# Altium PCB MAX51.PcbDoc (part 3 of 3)
Units mil, origin at the board's own origin, x right, y up, seen from the top; angles counter-clockwise.
Board outline 4625 x 3470 mil, 2 copper layers (Top Layer, Bottom Layer); 152 components, 205 nets, 817 pads, 224 vias.
Unrouted connection lines stored in the file: 41.
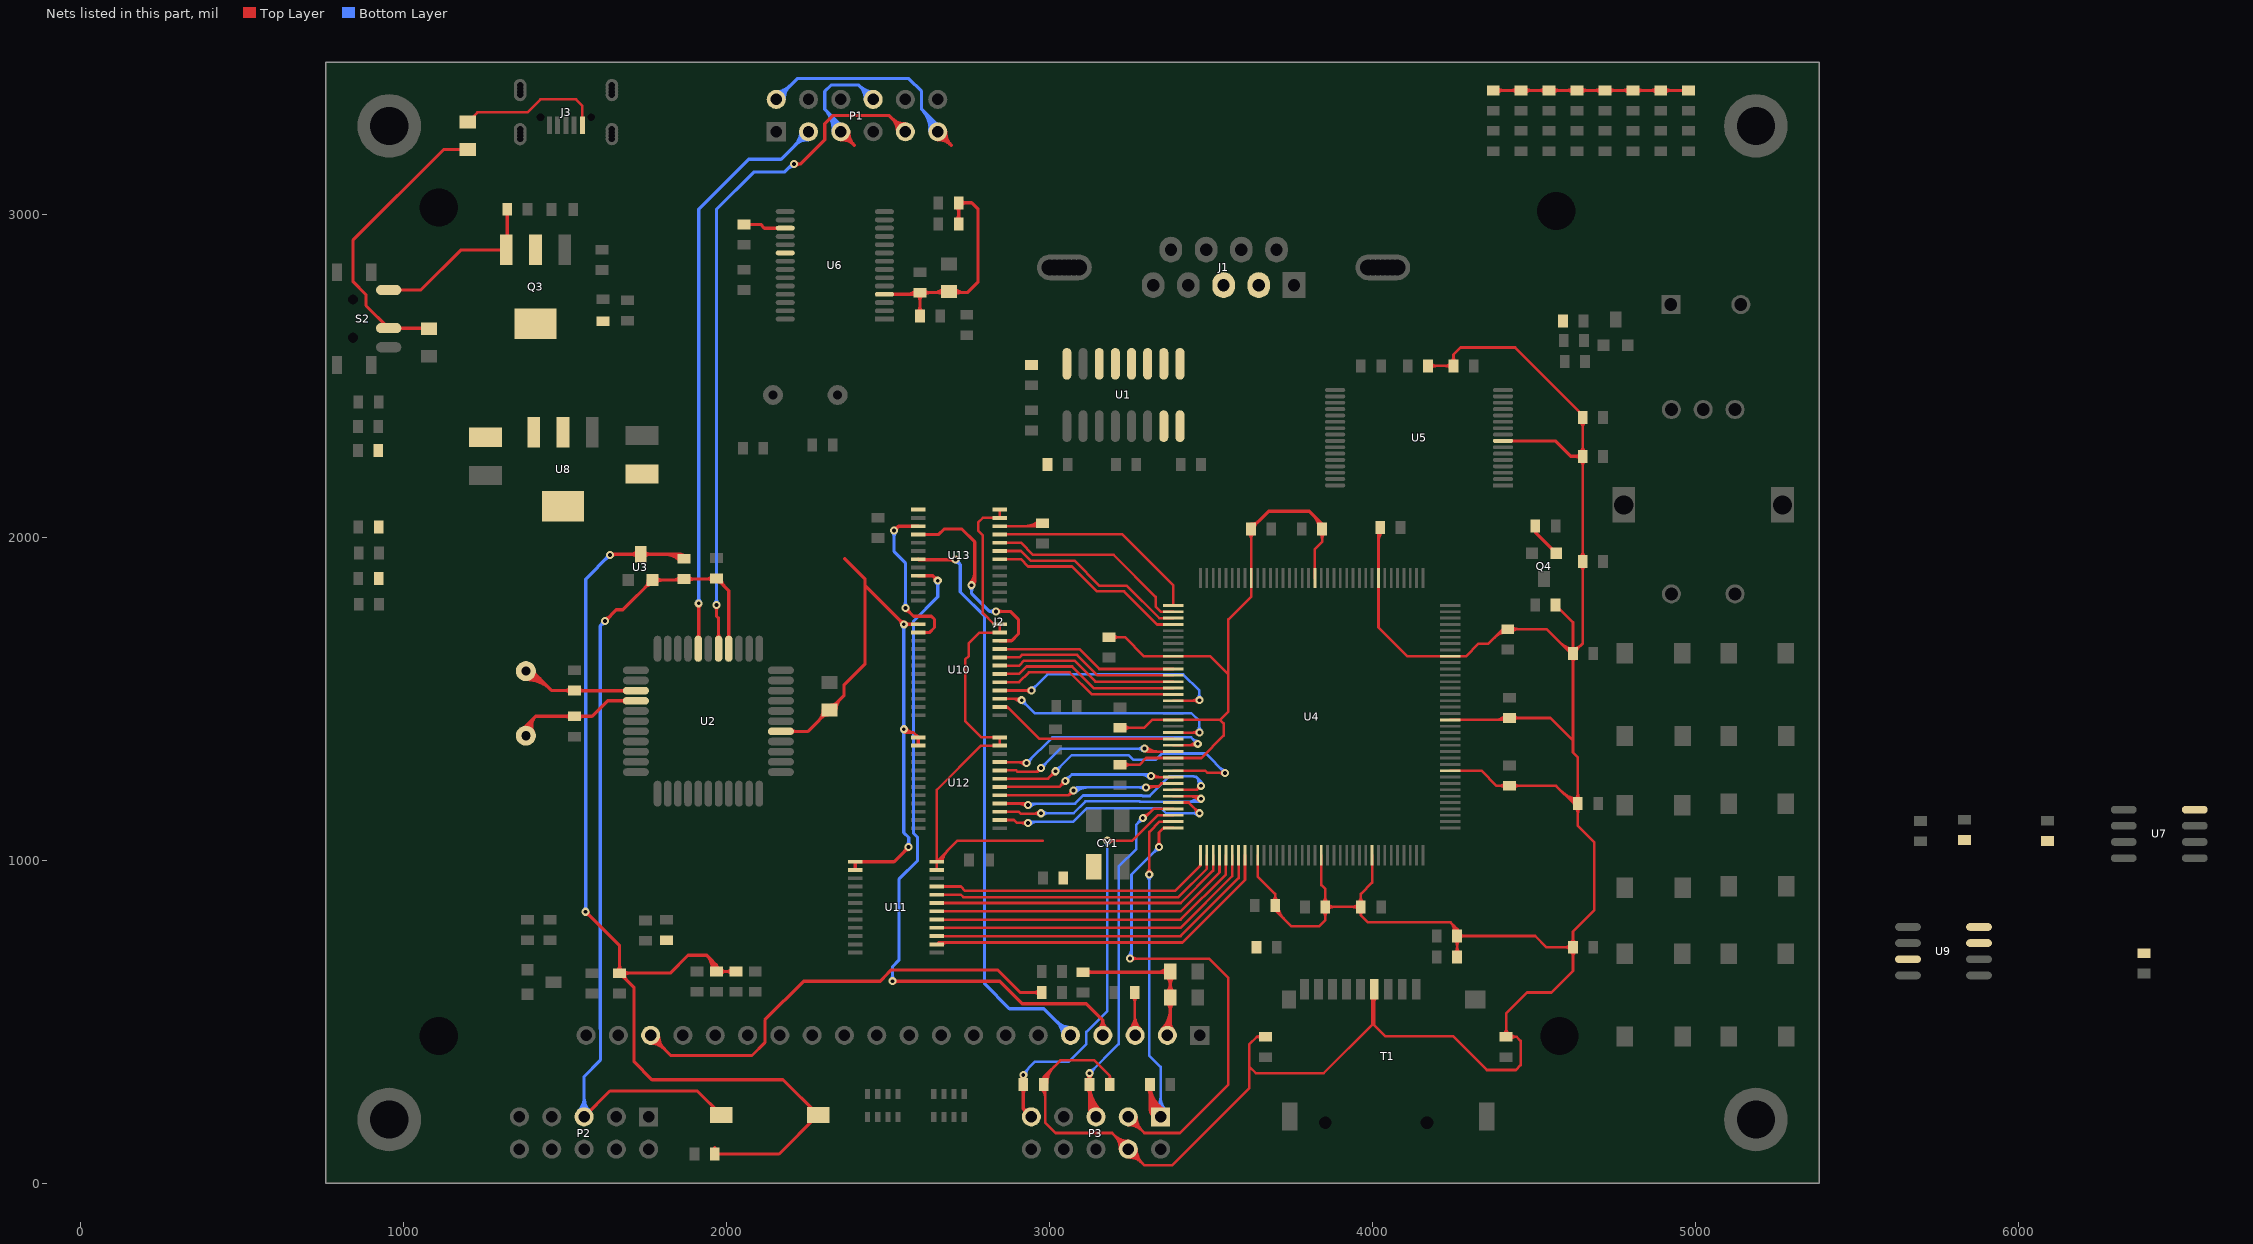
[diagram p3: the nets of this part, all layers, seen from the top]

## Via types
v1: diameter 25, hole 12, Top Layer to Bottom Layer, 224 vias

## Nets (pads, with @x,y where several pads share a name; then routed paths per layer and width w, separated by ;. In a path a pad name is that pad's centre, name@x,y a point inside that pad or via, vN(x,y) a via of type N, cw(c..) or ccw(c..) an arc to the next point about the centre after c; other vN are vias at no path point) (continued)
RESET: C7.1 P2.5 Q4.B R5.2 R50.1 S1.2 U2.4 U3.2 | length 3277.1
  Top Layer w10: P2.5@1560,205 1640,285 1911,285 S1.2@1985,211 ; v1(1625,1740) 1660,1775 1680,1775 U3.2@1772,1867 1867,1867 C7.1@1870,1870 1968,1870 R5.2@1970,1872 2007.99,1834.01 U2.4@2007.99,1654.41 ; v1@1625,1747.5 ccw(c1625,1765.61) 1637.8,1752.8 ccw(c1650.61,1740) v1@1632.5,1740 ; U3.2@1759,1867 cw(c1727.62,1867) 1749.81,1844.81 cw(c1772,1822.62) U3.2@1772,1854 ; U3.2@1781.19,1857.81 cw(c1803.38,1835.62) 1803.38,1867 cw(c1803.38,1898.38) U3.2@1781.19,1876.19 ; 1833.62,1867 ccw(c1833.62,1901.38) C7.1@1857.93,1877.07 ; 1848.1,1867 cw(c1848.1,1853.1) C7.1@1857.93,1862.93 ; C7.1@1882.07,1862.93 cw(c1899.14,1845.86) 1899.14,1870 cw(c1899.14,1894.14) C7.1@1882.07,1877.07 ; 1936.03,1870 ccw(c1936.03,1900.97) R5.2@1957.93,1879.07 ; 1945.69,1870 cw(c1945.69,1852.69) R5.2@1957.93,1864.93 ; R5.2@1975,1862 cw(c1975,1849.93) R5.2@1983.54,1858.46 ; R5.2@1985,1872 ccw(c2021.21,1872) 1995.61,1846.39 ; U2.4@2003.18,1687.77 ccw(c1991.55,1699.4) 2007.99,1699.4 ccw(c2024.44,1699.4) U2.4@2012.81,1687.77 ; R50.1@4505.5,2035 4505.5,2014.5 Q4.B@4570,1950
  Bottom Layer w10: P2.5@1542.66,222.34 ccw(c1500.79,264.21) 1560,264.21 ccw(c1619.21,264.21) P2.5@1577.34,222.34 ; P2.5@1549.73,215.27 ccw(c1524.93,240.07) 1560,240.07 ccw(c1595.07,240.07) P2.5@1570.27,215.27 ; P2.5@1560,205 1560,330 1610.71,380.71 1610.71,475.96 1610,476.67 1610,1725 v1(1625,1740) ; v1@1617.5,1740 cw(c1599.39,1740) 1612.2,1727.2 cw(c1625,1714.39) v1@1625,1732.5
RESPIN0: U4.42 U11.16 | length 1045.9
  Top Layer w8: U11.16@2651.97,790.28 3407.1,790.28 3566.94,950.11 U4.42@3566.94,1014.87
RESPIN1: U4.43 U11.15 | length 1079.6
  Top Layer w8: U11.15@2651.97,764.68 3406.96,764.68 3586.62,944.34 U4.43@3586.62,1014.87
RS: J2.4 U13.9 | length 2297.5
  Top Layer w10: v1(2515,625) 2846.72,625 2916.72,555 3115,555 3166.18,503.82 ; v1@2520.3,619.7 cw(c2533.11,606.89) 2533.11,625 cw(c2533.11,643.11) v1@2520.3,630.3 ; U13.9@2595,1880.28 2640,1880.28 2640,1880 v1(2655,1865) ; v1@2647.5,1865 ccw(c2629.39,1865) 2642.2,1877.8 ccw(c2655,1890.61) v1@2655,1872.5 ; J2.4@3152.4,477.81 ccw(c3134.75,503.82) 3166.18,503.82 ; J2.4@3166.18,457.52 3166.18,503.82 ; J2.4@3179.96,477.81 cw(c3197.61,503.82) 3166.18,503.82
  Bottom Layer w10: v1@2509.7,630.3 ccw(c2496.89,643.11) 2515,643.11 ccw(c2533.11,643.11) v1@2520.3,630.3 ; v1(2515,625) 2515,670 2535,690 2535,940 2592.5,997.5 2592.5,1070.78 2580,1083.28 2580,1740 2655,1815 v1(2655,1865) ; v1@2649.7,1859.7 cw(c2636.89,1846.89) 2655,1846.89 cw(c2673.11,1846.89) v1@2660.3,1859.7
RS232_RXD1: J1.2 U1.13
RS232_RXD2: U1.8
RS232_TXD1: J1.3 U1.14
RS232_TXD2: U1.7
RW: J2.5 U13.7 | length 2003.2
  Top Layer w10: U13.7@2595,1931.46 2596.46,1930 v1(2710,1930) ; v1@2704.7,1924.7 ccw(c2691.89,1911.89) 2691.89,1930 ccw(c2691.89,1948.11) v1@2704.7,1935.3
  Bottom Layer w10: v1@2710,1922.5 cw(c2710,1904.39) 2722.8,1917.2 cw(c2735.61,1930) v1@2717.5,1930 ; v1(2710,1930) 2725,1915 2725,1830 2800,1755 2800,616.87 2876.87,540 2983.7,540 J2.5@3066.18,457.52 ; J2.5@3041.65,457.52 ccw(c2982.44,457.52) 3024.31,499.39 ccw(c3066.18,541.26) J2.5@3066.18,482.05 ; J2.5@3051.65,457.52 ccw(c3016.58,457.52) 3041.38,482.32 ccw(c3066.18,507.12) J2.5@3066.18,472.05
RXD1: P1.2 P1.11 U1.12 | length 1122.8
  Top Layer w10: P1.2@2155,3355 P1.2@2155,3373.28 ; P1.11@2655,3230.47 cw(c2655,3171.26) 2696.87,3213.13 cw(c2738.74,3255) P1.11@2679.53,3255 ; P1.11@2655,3240.47 cw(c2655,3205.4) 2679.8,3230.2 cw(c2704.6,3255) P1.11@2669.53,3255
  Bottom Layer w10: P1.2@2155,3355 2219.53,3419.53 2565.47,3419.53 2605,3380 2605,3325 ; P1.2@2155,3369.53 ccw(c2155,3404.6) 2179.8,3379.8 ccw(c2204.6,3355) P1.2@2169.53,3355 ; P1.2@2155,3379.53 ccw(c2155,3438.74) 2196.87,3396.87 ccw(c2238.74,3355) P1.2@2179.53,3355 ; 2620.52,3309.48 cw(c2571.85,3260.82) P1.11@2640.51,3256.01 ; P1.11@2630.53,3256.71 ccw(c2542.85,3262.85) 2605,3325 ; 2636.03,3293.97 cw(c2600.85,3258.79) P1.11@2650.48,3255.32 ; P1.11@2650,3260 2650,3280 2605,3325
RXD2: U1.9
S52_RXD: P1.9 U2.5 | length 2408.4
  Top Layer w10: v1@1964.7,1784.7 cw(c1951.89,1771.89) 1970,1771.89 cw(c1988.11,1771.89) v1@1975.3,1784.7 ; v1(1970,1790) 1970,1755 1976.5,1748.5 U2.5@1976.5,1654.41 ; U2.5@1971.68,1687.77 ccw(c1960.05,1699.4) 1976.5,1699.4 ccw(c1992.94,1699.4) U2.5@1981.31,1687.77 ; v1(2210,3155) 2230,3155 2305,3230 2305,3280 2330,3305 2505,3305 P1.9@2555,3255 ; v1@2215.3,3149.7 cw(c2228.11,3136.89) 2228.11,3155 cw(c2228.11,3173.11) v1@2215.3,3160.3 ; P1.9@2530.47,3255 ccw(c2471.26,3255) 2513.13,3296.87 ccw(c2555,3338.74) P1.9@2555,3279.53 ; P1.9@2540.47,3255 ccw(c2505.4,3255) 2530.2,3279.8 ccw(c2555,3304.6) P1.9@2555,3269.53
  Bottom Layer w10: v1@1964.7,1795.3 ccw(c1951.89,1808.11) 1970,1808.11 ccw(c1988.11,1808.11) v1@1975.3,1795.3 ; v1(1970,1790) 1970,3015 2085,3130 2180,3130 2210,3160 v1(2210,3155) ; 2188.66,3138.66 cw(c2210,3117.32) v1@2210,3147.5
S52_TXD: P1.3 U2.7 | length 2031.4
  Top Layer w10: U2.7@1908.69,1687.77 ccw(c1893.45,1703.01) 1915,1703.01 ; v1@1909.7,1789.7 cw(c1896.89,1776.89) 1915,1776.89 cw(c1933.11,1776.89) v1@1920.3,1789.7 ; U2.7@1913.5,1654.41 1915,1655.91 v1(1915,1795) ; 1915,1695.78 ccw(c1926.34,1695.78) U2.7@1918.32,1687.77
  Bottom Layer w10: v1@1909.7,1800.3 ccw(c1896.89,1813.11) 1915,1813.11 ccw(c1933.11,1813.11) v1@1920.3,1800.3 ; v1(1915,1795) 1915,3015 2070,3170 2170,3170 P1.3@2255,3255 ; P1.3@2230.47,3255 cw(c2171.26,3255) 2213.13,3213.13 cw(c2255,3171.26) P1.3@2255,3230.47 ; P1.3@2240.47,3255 cw(c2205.4,3255) 2230.2,3230.2 cw(c2255,3205.4) P1.3@2255,3240.47
STA_NOE: R60.2 U13.22 | length 212.6
  Top Layer w8: U13.22@2846.97,2033.82 2970.82,2033.82 R60.2@2980,2043 ; 2926.28,2033.82 ccw(c2926.28,2091.72) R60.2@2967.22,2050.78 ; 2945.59,2033.82 ccw(c2945.59,2072.41) R60.2@2972.88,2045.12
TCK: P3.1 R6.2 U4.35 | length 1796.4
  Top Layer w8: v1@3303.99,961.01 ccw(c3289.48,975.52) 3310,975.52 ccw(c3330.52,975.52) v1@3316.01,961.01 ; v1(3310,955) 3310,1087.07 3342.13,1119.2 U4.35@3383.87,1119.2
  Top Layer w10: R6.2@3304.93,292.93 cw(c3287.86,275.86) 3312,275.86 cw(c3336.14,275.86) R6.2@3319.07,292.93 ; 3312,235.47 ccw(c3362.72,235.47) P3.1@3337.22,191.62 ; 3312,252.85 ccw(c3372.82,252.85) P3.1@3342.25,200.27 ; 3312,270.23 ccw(c3382.93,270.23) P3.1@3347.28,208.91 ; R6.2@3312,287.61 ccw(c3393.04,287.61) P3.1@3352.3,217.56 ; P3.1@3320.88,209.45 ccw(c3289.28,215.28) 3312,238 ; P3.1@3340.55,229.12 cw(c3334.72,260.72) 3312,238 ; P3.1@3345,205 3312,238 ; P3.1@3357.33,226.2 cw(c3403.15,305) R6.2@3312,305 3312,238
  Bottom Layer w8: v1@3303.99,948.99 cw(c3290.18,935.18) 3309.71,935.18 ; 3309.71,933.78 cw(c3331.22,933.78) v1@3316.01,948.99 ; v1(3310,955) 3309.71,955.29 3309.71,395.29 3345,360 P3.1@3345,205 ; P3.1@3326.95,223.05 ccw(c3283.37,266.63) 3345,266.63 ccw(c3406.63,266.63) P3.1@3363.05,223.05 ; P3.1@3332.61,217.39 ccw(c3302.68,247.32) 3345,247.32 ccw(c3387.32,247.32) P3.1@3357.39,217.39
TDI: P3.9 R9.1 U4.34 | length 1515.5
  Top Layer w8: R9.1@2912.57,318.11 ccw(c2897.09,335) v1(2920,335) ; v1@2913.99,328.99 cw(c2899.48,314.48) 2920,314.48 cw(c2940.52,314.48) v1@2926.01,328.99 ; v1@2915,340 v1(2920,335) ; R9.1@2920,305 v1(2920,335) ; R9.1@2927.43,318.11 cw(c2942.91,335) v1(2920,335) ; v1(3180,1060) 3257.48,1060 3336.36,1138.88 U4.34@3383.87,1138.88 ; v1@3186.01,1053.99 cw(c3200.52,1039.48) 3200.52,1060 cw(c3200.52,1080.52) v1@3186.01,1066.01
  Top Layer w10: R9.1@2912.93,292.93 cw(c2895.86,275.86) 2920,275.86 cw(c2944.14,275.86) R9.1@2927.07,292.93 ; R9.1@2920,305 2920,230 ; P3.9@2922.68,215.17 ccw(c2910.66,220.65) 2920,230 ; P3.9@2934.83,227.32 cw(c2929.35,239.34) 2920,230 ; P3.9@2945,205 2920,230
  Bottom Layer w8: v1(2920,335) 2915,340 2920,340 2955,375 3060,375 3115,430 3115,467.9 3180,532.9 v1(3180,1060) ; v1@2928.5,335 cw(c2961.09,335) 2938.05,358.05 ; v1@3173.99,1053.99 cw(c3159.48,1039.48) 3180,1039.48 cw(c3200.52,1039.48) v1@3186.01,1053.99
TDO: P3.3 U4.36 | length 1838.2
  Top Layer w8: P3.3@3245,179.47 cw(c3245,117.84) 3288.58,161.42 cw(c3332.16,205) P3.3@3270.53,205 ; P3.3@3245,187.47 cw(c3245,145.16) 3274.92,175.08 cw(c3304.84,205) P3.3@3262.53,205 ; P3.3@3245,205 3295,155 3405,155 3555,305 3555,634.54 3494.54,695 v1(3250,695) ; v1@3256.01,688.99 cw(c3270.52,674.48) 3270.52,695 cw(c3270.52,715.52) v1@3256.01,701.01 ; v1@3333.99,1046.01 ccw(c3319.48,1060.52) 3340,1060.52 ccw(c3360.52,1060.52) v1@3346.01,1046.01 ; v1(3340,1040) 3340,1085 3354.51,1099.51 U4.36@3383.87,1099.51 ; U4.36@3352.4,1097.4 cw(c3356.7,1093.1) U4.36@3356.7,1099.18
  Bottom Layer w8: v1@3243.99,701.01 ccw(c3217.41,727.59) 3255,727.59 ; v1@3249.65,695.35 ccw(c3236.72,708.28) 3255,708.28 ; v1(3250,695) 3255,700 3255,955 v1(3340,1040) ; v1@3331.5,1040 cw(c3310.98,1040) 3325.49,1025.49 cw(c3340,1010.98) v1@3340,1031.5
TMS: P3.5 R8.1 U4.33 | length 1616.3
  Top Layer w8: R8.1@3117.22,317.78 ccw(c3098.44,336.56) 3125,336.56 ccw(c3151.56,336.56) R8.1@3132.78,317.78 ; v1@3118.99,333.99 cw(c3104.48,319.48) 3125,319.48 cw(c3145.52,319.48) v1@3131.01,333.99 ; v1@3119.24,333.75 cw(c3113.12,327.11) 3121.84,324.77 cw(c3132.61,321.88) v1@3128.29,332.16 ; v1@3121.71,332.16 cw(c3117.39,321.88) 3128.16,324.77 cw(c3136.88,327.11) v1@3130.76,333.75 ; R8.1@3125,305 v1(3125,340) ; v1(3290,1130) 3295,1130 3323.57,1158.57 U4.33@3383.87,1158.57 ; v1@3290,1138.5 ccw(c3290,1171.09) 3313.05,1148.05
  Top Layer w10: R8.1@3117.93,292.93 cw(c3100.86,275.86) 3125,275.86 cw(c3149.14,275.86) R8.1@3132.07,292.93 ; 3125,237.62 ccw(c3174.37,237.62) P3.5@3141.34,200.93 ; 3125,260.08 ccw(c3194.58,260.08) P3.5@3148.03,208.36 ; 3125,282.54 ccw(c3214.8,282.54) P3.5@3154.72,215.8 ; P3.5@3145,205 3125,225 R8.1@3125,305 ccw(c3235.01,304.99) P3.5@3161.41,223.23
  Bottom Layer w8: v1(3125,340) 3215,430 3215,980 3270,1035 3270,1110 v1(3290,1130) ; v1@3125,348.5 ccw(c3125,369.02) 3139.51,354.51 ccw(c3154.02,340) v1@3133.5,340 ; v1@3281.5,1130 cw(c3260.98,1130) 3275.49,1115.49 cw(c3290,1100.98) v1@3290,1121.5
TXD1: P1.5 P1.8 U1.11 | length 795
  Top Layer w10: P1.5@2355,3230.47 cw(c2355,3171.26) 2396.87,3213.13 cw(c2438.74,3255) P1.5@2379.53,3255 ; P1.5@2355,3240.47 cw(c2355,3205.4) 2379.8,3230.2 cw(c2404.6,3255) P1.5@2369.53,3255
  Bottom Layer w10: 2320.52,3309.48 cw(c2271.85,3260.82) P1.5@2340.51,3256.01 ; P1.5@2330.53,3256.71 ccw(c2242.85,3262.85) 2305,3325 ; 2336.03,3293.97 cw(c2300.85,3258.79) P1.5@2350.48,3255.32 ; P1.5@2355,3255 2355,3275 2305,3325 ; P1.8@2430.47,3355 ccw(c2371.26,3355) 2413.13,3396.87 ccw(c2455,3438.74) P1.8@2455,3379.53 ; P1.8@2440.47,3355 ccw(c2405.4,3355) 2430.2,3379.8 ccw(c2455,3404.6) P1.8@2455,3369.53 ; P1.8@2455,3355 2410.47,3399.53 2324.53,3399.53 2305,3380 2305,3325
TXD2: U1.10
V3_A8: U4.23 U12.21 | length 872.2
  Top Layer w8: U12.21@2846.97,1303.23 2926.77,1303.23 v1(2930,1300) ; 2901.69,1303.23 cw(c2901.69,1271.69) v1@2923.99,1293.99 ; 2917.27,1303.23 ccw(c2917.27,1312.73) v1@2923.99,1306.01 ; U4.23@3383.87,1355.42 3455.42,1355.42 v1(3460,1360) ; 3428.42,1355.42 ccw(c3428.42,1391.58) v1@3453.99,1366.01 ; 3447.73,1355.42 ccw(c3447.73,1372.27) v1@3459.65,1360.35
  Bottom Layer w8: v1(2930,1300) 3010,1380 3440,1380 v1(3460,1360) ; v1@2930,1308.5 ccw(c2930,1329.02) 2944.51,1314.51 ccw(c2959.02,1300) v1@2938.5,1300 ; v1@3451.5,1360 ccw(c3430.98,1360) 3445.49,1374.51 ccw(c3460,1389.02) v1@3460,1368.5
V3_A9: U4.24 U12.20 | length 738.6
  Top Layer w8: U12.20@2846.97,1277.64 2897.36,1277.64 2901.5,1273.5 2963.5,1273.5 ; v1@2966.63,1283.5 cw(c2955.5,1281.5) 2963.5,1273.5 ; v1@2973.5,1276.63 ccw(c2971.5,1265.5) 2963.5,1273.5 ; v1(2975,1285) 2963.5,1273.5 ; v1(3295,1345) 3304.27,1335.73 ; v1@3295.35,1345.35 ccw(c3318.58,1368.58) 3318.58,1335.73 ; v1@3298.04,1337.06 cw(c3300.13,1331.59) 3304.27,1335.73 ; v1@3301.01,1351.01 ccw(c3337.89,1387.89) 3337.89,1335.73 ; v1@3302.94,1341.96 ccw(c3308.41,1339.87) 3304.27,1335.73 ; U4.24@3383.87,1335.73 3304.27,1335.73
  Bottom Layer w8: v1(2975,1285) 3035,1345 v1(3295,1345) ; v1@2975,1293.5 ccw(c2975,1314.02) 2989.51,1299.51 ccw(c3004.02,1285) v1@2983.5,1285 ; v1@3288.99,1338.99 ccw(c3274.48,1324.48) 3274.48,1345 ccw(c3274.48,1365.52) v1@3288.99,1351.01
V3_A10: U4.27 U12.19 | length 1060.4
  Top Layer w8: U12.19@2846.97,1252.05 2997.05,1252.05 v1(3020,1275) ; v1@3011.5,1275 cw(c2990.98,1275) 3005.49,1260.49 cw(c3020,1245.98) v1@3020,1266.5 ; U4.27@3383.87,1276.68 3483.32,1276.68 3490,1270 v1(3545,1270) ; v1@3538.99,1263.99 ccw(c3524.48,1249.48) 3524.48,1270 ccw(c3524.48,1290.52) v1@3538.99,1276.01
  Bottom Layer w8: v1(3020,1275) 3070,1325 3246.25,1325 3261.25,1310 3330,1310 3350,1330 3485,1330 v1(3545,1270) ; v1@3020,1283.5 ccw(c3020,1304.02) 3034.51,1289.51 ccw(c3049.02,1275) v1@3028.5,1275 ; v1@3536.5,1270 ccw(c3515.98,1270) 3530.49,1284.51 ccw(c3545,1299.02) v1@3545,1278.5
V3_A11: U4.28 U12.18 | length 693.4
  Top Layer w8: U12.18@2846.97,1226.46 3031.46,1226.46 v1(3050,1245) ; v1@3041.5,1245 cw(c3020.98,1245) 3035.49,1230.49 cw(c3050,1215.98) v1@3050,1236.5 ; v1@3315,1256.99 U4.28@3383.87,1256.99 ; v1@3321.01,1253.99 cw(c3328.26,1246.74) 3328.26,1256.99 ; v1@3321.01,1266.01 ccw(c3342.78,1287.78) 3342.78,1256.99
  Bottom Layer w8: v1(3050,1245) 3070,1265 v1@3315,1265 ; v1@3050,1253.5 ccw(c3050,1274.02) 3064.51,1259.51 ccw(c3079.02,1245) v1@3058.5,1245 ; 3282.41,1265 cw(c3282.41,1227.41) v1@3308.99,1253.99 ; 3301.72,1265 cw(c3301.72,1246.72) v1@3314.65,1259.65
  other v1: 3315,1260
V3_A12: U4.29 U12.17 | length 718.7
  Top Layer w8: U12.17@2846.97,1200.87 3060.87,1200.87 ; v1@3066.5,1214.84 cw(c3047.26,1214.48) 3060.87,1200.87 ; v1@3074.84,1206.5 ccw(c3074.48,1187.26) 3060.87,1200.87 ; v1(3075,1215) 3060.87,1200.87 ; v1(3300,1225) 3303.5,1228.5 3309.02,1228.5 3309.77,1227.75 3338.37,1227.75 3347.93,1237.31 U4.29@3383.87,1237.31 ; v1@3306.01,1218.99 cw(c3327.16,1197.84) 3327.16,1227.75 ; v1@3306.01,1231.01 ccw(c3313.88,1238.88) 3313.88,1227.75
  Bottom Layer w8: v1(3075,1215) 3085,1225 v1(3300,1225) ; v1@3075.35,1214.65 cw(c3100.35,1189.65) 3100.35,1225 ; v1@3081.01,1208.99 cw(c3119.66,1170.34) 3119.66,1225 ; v1@3293.99,1218.99 ccw(c3279.48,1204.48) 3279.48,1225 ccw(c3279.48,1245.52) v1@3293.99,1231.01
V3_A13: U4.30 U12.16 | length 952.7
  Top Layer w8: U12.16@2846.97,1175.28 2929.72,1175.28 v1(2935,1170) ; 2901.74,1175.28 cw(c2901.74,1136.74) v1@2928.99,1163.99 ; 2921.06,1175.28 cw(c2921.06,1156.06) v1@2934.65,1169.65 ; U4.30@3383.87,1217.62 3457.62,1217.62 ; v1@3461.56,1228.99 cw(c3447.89,1227.36) 3457.62,1217.62 ; v1@3468.99,1221.56 ccw(c3467.36,1207.89) 3457.62,1217.62 ; v1(3470,1230) 3457.62,1217.62
  Bottom Layer w8: v1(2935,1170) 2940,1175 3080,1175 3105,1200 3287.52,1200 3289.02,1198.5 3310.98,1198.5 3372.48,1260 3447.52,1260 3449.02,1258.5 3455,1258.5 ; v1@2935.35,1169.65 cw(c2948.28,1156.72) 2948.28,1175 ; v1@2941.01,1163.99 cw(c2967.59,1137.41) 2967.59,1175 ; v1@3461.82,1232.31 ccw(c3436.1,1239.59) 3455,1258.5 ; 3464.64,1248.86 cw(c3451.13,1235.34) v1@3469.52,1230.14 ; v1@3466.33,1237.67 ccw(c3463.53,1243.5) 3470,1243.5 ; v1(3470,1230) 3470,1243.5 ; v1@3473.67,1237.67 cw(c3476.47,1243.5) 3470,1243.5 ; 3455,1258.5 3470,1243.5
V3_A14: U4.31 U12.15 | length 927.6
  Top Layer w8: U12.15@2846.97,1149.68 2905.32,1149.68 2911.5,1143.5 2973.5,1143.5 v1(2975,1145) ; 2950.86,1143.5 ccw(c2950.86,1169.14) v1@2968.99,1151.01 ; 2958.1,1143.5 cw(c2958.1,1128.1) v1@2968.99,1138.99 ; U4.31@3383.87,1197.94 3462.06,1197.94 v1(3470,1190) ; 3430.32,1197.94 cw(c3430.32,1150.32) v1@3463.99,1183.99 ; 3449.63,1197.94 cw(c3449.63,1169.63) v1@3469.65,1189.65
  Bottom Layer w8: v1(2975,1145) 3075.46,1145 3112.46,1182 3280.07,1182 3281.57,1180.5 3460.5,1180.5 v1(3470,1190) ; v1@2981.01,1138.99 cw(c2995.52,1124.48) 2995.52,1145 cw(c2995.52,1165.52) v1@2981.01,1151.01 ; 3426.54,1180.5 ccw(c3426.54,1233.46) v1@3463.99,1196.01 ; 3445.86,1180.5 ccw(c3445.86,1214.14) v1@3469.65,1190.35
V3_A15: U4.32 U12.14 | length 870.5
  Top Layer w8: U12.14@2846.97,1124.09 2890.91,1124.09 2900,1115 v1(2935,1115) ; v1@2928.99,1108.99 ccw(c2914.48,1094.48) 2914.48,1115 ccw(c2914.48,1135.52) v1@2928.99,1121.01 ; U4.32@3383.87,1178.25 3431.75,1178.25 v1(3465,1145) ; v1@3456.5,1145 ccw(c3435.98,1145) 3450.49,1159.51 ccw(c3465,1174.02) v1@3465,1153.5
  Bottom Layer w8: v1(2935,1115) 2938.5,1118.5 3074.41,1118.5 3115.91,1160 3347.5,1160 3362.5,1145 v1(3465,1145) ; v1@2941.01,1108.99 cw(c2963.97,1086.03) 2963.97,1118.5 ; v1@2941.01,1121.01 ccw(c2947.07,1127.07) 2947.07,1118.5 ; v1@3458.99,1138.99 ccw(c3444.48,1124.48) 3444.48,1145 ccw(c3444.48,1165.52) v1@3458.99,1151.01
V3_AD0: U4.11 U10.21 | length 562.4
  Top Layer w8: U10.21@2846.97,1653.23 3093.59,1653.23 3155.19,1591.64 U4.11@3383.87,1591.64
V3_AD1: U4.12 U10.20 | length 566.3
  Top Layer w8: U10.20@2846.97,1627.64 2907.64,1627.64 2915.23,1635.23 3086.14,1635.23 3149.41,1571.95 U4.12@3383.87,1571.95
V3_AD2: U4.13 U10.19 | length 570.1
  Top Layer w8: U10.19@2846.97,1602.05 2907.5,1602.05 2922.68,1617.23 3078.68,1617.23 3143.64,1552.27 U4.13@3383.87,1552.27
V3_AD3: U4.14 U10.18 | length 573.9
  Top Layer w8: U10.18@2846.97,1576.46 2907.37,1576.46 2930.14,1599.23 3071.23,1599.23 3137.87,1532.58 U4.14@3383.87,1532.58
V3_AD4: U4.15 U10.17 | length 577.8
  Top Layer w8: U10.17@2846.97,1550.87 2907.23,1550.87 2937.6,1581.23 3063.77,1581.23 3132.1,1512.9 U4.15@3383.87,1512.9
V3_AD5: U4.16 U10.16 | length 900.4
  Top Layer w8: U10.16@2846.97,1525.28 2847.24,1525 v1(2945,1525) ; v1@2938.99,1518.99 ccw(c2924.48,1504.48) 2924.48,1525 ccw(c2924.48,1545.52) v1@2938.99,1531.01 ; U4.16@3383.87,1493.21 3463.21,1493.21 v1(3465,1495) ; 3440.16,1493.21 ccw(c3440.16,1519.84) v1@3458.99,1501.01 ; 3448.79,1493.21 cw(c3448.79,1478.79) v1@3458.99,1488.99
  Bottom Layer w8: v1(2945,1525) 2995,1575 3415,1575 3465,1525 v1(3465,1495) ; v1@2945,1533.5 ccw(c2945,1554.02) 2959.51,1539.51 ccw(c2974.02,1525) v1@2953.5,1525 ; v1@3458.99,1501.01 ccw(c3444.48,1515.52) 3465,1515.52 ccw(c3485.52,1515.52) v1@3471.01,1501.01
V3_AD6: U4.21 U10.15 | length 902
  Top Layer w8: U10.15@2846.97,1499.68 2910.32,1499.68 v1(2915,1495) ; 2883.17,1499.68 cw(c2883.17,1463.17) v1@2908.99,1488.99 ; 2902.48,1499.68 cw(c2902.48,1482.48) v1@2914.65,1494.65 ; U4.21@3383.87,1394.79 3464.79,1394.79 v1(3465,1395) ; 3443.97,1394.79 ccw(c3443.97,1416.03) v1@3458.99,1401.01 ; 3444.99,1394.79 cw(c3444.99,1374.99) v1@3458.99,1388.99
  Bottom Layer w8: v1@2915,1486.5 cw(c2915,1465.98) 2929.51,1480.49 cw(c2944.02,1495) v1@2923.5,1495 ; v1(2915,1495) 2955,1455 3440,1455 3465,1430 v1(3465,1395) ; v1@3458.99,1401.01 ccw(c3444.48,1415.52) 3465,1415.52 ccw(c3485.52,1415.52) v1@3471.01,1401.01
V3_AD7: U4.22 U10.14 | length 595.2
  Top Layer w8: U10.14@2846.97,1474.09 2870.91,1474.09 2969.9,1375.1 U4.22@3383.87,1375.1 ; U10.14@2863.7,1472.19 cw(c2863.7,1450.2) 2879.25,1465.75
V3_AD_DIR: U4.1 U13.21 | length 670.9
  Top Layer w8: U13.21@2846.97,2008.23 2847.74,2009 3226,2009 3383.87,1851.13 U4.1@3383.87,1788.49 ; U13.21@2865.05,2006.88 cw(c2870.16,2001.76) 2870.16,2009
V3_AD_NOE: U4.2 U13.20 | length 642.8
  Top Layer w8: U13.20@2846.97,1982.64 2912.36,1982.64 2950,1945 3200,1945 3330,1815 3330,1785.46 3346.65,1768.8 U4.2@3383.87,1768.8
V3_ALE: U4.41 U11.17 | length 1012.3
  Top Layer w8: U11.17@2651.97,815.87 3407.23,815.87 3547.25,955.88 U4.41@3547.25,1014.87
V3_EPM_RXD: U4.44 U11.14 | length 1135.8
  Top Layer w8: U11.14@2651.97,739.09 2657.65,744.78 3412.51,744.78 3606.31,938.57 U4.44@3606.31,1014.87 ; U11.14@2664.39,743.4 cw(c2667.71,740.08) U11.14@2667.71,744.78 ; U11.14@2670.05,737.75 cw(c2687.03,720.77) 2687.03,744.78
V3_EPM_TXD: U4.4 U13.18 | length 620.6
  Top Layer w8: U13.18@2846.97,1931.46 2912.63,1931.46 2935.09,1909 3070.54,1909 3147.54,1832 3232.09,1832 3334.66,1729.43 U4.4@3383.87,1729.43
V3_LIB: U4.37 U11.21 | length 894.5
  Top Layer w8: U11.21@2651.97,918.23 2726.77,918.23 2740,905 3390,905 3468.51,983.51 U4.37@3468.51,1014.87 ; 3464.99,979.99 ccw(c3457.27,987.7) U4.37@3468.18,987.7
V3_NINT0: U4.3 U13.19 | length 623
  Top Layer w8: U13.19@2846.97,1957.05 2912.5,1957.05 2942.54,1927 3078,1927 3155,1850 3240,1850 3340.88,1749.12 U4.3@3383.87,1749.12
V3_NPSEN: U4.38 U11.20 | length 917.6
  Top Layer w8: U11.20@2651.97,892.64 2726.91,892.64 2734.54,885 3400,885 3488.2,973.2 U4.38@3488.2,1014.87
V3_NRD: U4.39 U11.19 | length 945
  Top Layer w8: U11.19@2651.97,867.05 U11.19@2651.97,867.05 3407.46,867 3507.88,967.43 U4.39@3507.88,1014.87
V3_NWR: U4.40 U11.18 | length 978.6
  Top Layer w8: U11.18@2651.97,841.46 3407.37,841.46 3527.57,961.66 U4.40@3527.57,1014.87
V5_AD_DIR: U10.2 U13.3 | length 634.9
  Top Layer w10: v1(2520,2020) 2533.82,2033.82 U13.3@2595,2033.82 ; v1@2520,2027.5 ccw(c2520,2045.61) 2532.8,2032.8 ccw(c2545.61,2020) v1@2527.5,2020 ; v1@2555,1772.5 cw(c2555,1754.39) 2567.8,1767.2 cw(c2580.61,1780) v1@2562.5,1780 ; v1(2555,1780) 2580,1755 2635,1755 2645,1745 2645,1720 2629.41,1704.41 U10.2@2595,1704.41
  Bottom Layer w10: v1@2514.7,2014.7 cw(c2501.89,2001.89) 2520,2001.89 cw(c2538.11,2001.89) v1@2525.3,2014.7 ; v1(2520,2020) 2520,1955 2555,1920 v1(2555,1780) ; v1@2549.7,1785.3 ccw(c2536.89,1798.11) 2555,1798.11 ccw(c2573.11,1798.11) v1@2560.3,1785.3
V5_AD_NOE: U10.22 U13.4 | length 819.7
  Top Layer w10: U13.4@2595,2008.23 2658.23,2008.23 2675,2025 2730,2025 2770,1985 2770,1861 ; v1@2754.7,1856.3 ccw(c2717.75,1893.25) 2770,1893.25 ; v1(2760,1851) 2770,1861 ; v1@2761.42,1858.37 ccw(c2763.22,1867.78) 2770,1861 ; v1@2761.77,1849.23 ccw(c2741.89,1869.11) 2770,1869.11 ; v1@2767.37,1852.42 cw(c2776.78,1854.22) 2770,1861 ; v1(2835,1770) 2880,1770 2905,1745 2905,1700.06 2883.76,1678.82 U10.22@2846.97,1678.82 ; v1@2840.3,1764.7 cw(c2853.11,1751.89) 2853.11,1770 cw(c2853.11,1788.11) v1@2840.3,1775.3
  Bottom Layer w10: v1@2754.7,1845.7 cw(c2741.89,1832.89) 2760,1832.89 cw(c2778.11,1832.89) v1@2765.3,1845.7 ; v1(2760,1851) 2760,1825 2815,1770 v1(2835,1770) ; v1@2829.7,1764.7 ccw(c2816.89,1751.89) 2816.89,1770 ccw(c2816.89,1788.11) v1@2829.7,1775.3
VBUS: F1.1 J3.1 | length 452.3
  Top Layer w8: F1.1@1200,3285 1230,3315 1385,3315 1425,3355 1535,3355 1555,3335 J3.1@1555,3275
VCC3V3: C10.1 C11.1 C12.1 C13.1 C14.1 C15.1 C16.1 C17.1 C18.1 C19.1 C20.1 C21.1 C22.1 C25.2 C37.1 CY1.4 P3.4 R8.2 R9.2 R10.2 R12.2 R24.2 R25.2 R26.2 R27.2 R28.2 R29.2 R30.2 R31.2 R32.2 R33.2 R35.2 R38.2 R39.2 R40.2 R41.2 R42.2 R43.2 R44.2 R55.1 R56.1 R62.2 R65.2 T1.4 U4.9 U4.19 U4.25 U4.46 U4.56 U4.64 U4.82 U4.90 U4.100 U4.116 U4.126 U4.136 U5.8 U7.8 U8.2 U8.4 U9.3 U9.7 U9.8 U10.23 U10.24 U11.23 U11.24 U12.23 U12.24 U13.23 U13.24 | length 17440.4
  Top Layer w8: U11.23@2651.97,969.41 U11.24@2651.97,995 ; U11.24@2654.61,995 cw(c2660.97,995) U11.24@2656.47,999.5 ; U11.24@2662.61,995 cw(c2688.29,995) 2670.13,1013.16 ; U11.24@2670.61,995 cw(c2715.6,995) 2683.79,1026.82 ; U13.24@2846.97,2085 U13.23@2846.97,2059.41 2794.41,2059.41 2780,2045 2780,2020 2795,2005 2795,1765 2830,1730 U10.24@2846.97,1730 U10.23@2846.97,1704.41 2784.41,1704.41 2751.5,1671.5 2751.5,1632.52 2740,1621.02 2740,1430 2790,1380 U12.24@2846.97,1380 U12.23@2846.97,1354.41 2789.41,1354.41 2651.97,1216.97 U11.24@2651.97,995 ; R9.2@2975.22,292.22 cw(c2943.1,260.1) 2988.53,260.1 ; R9.2@2978,310 cw(c3009.38,310) 2987.19,332.19 ; R9.2@2977.98,319.79 ccw(c2973.77,328) 2983,328 ; 2980,1060 2716.97,1060 U11.24@2651.97,995 ; R9.2@2980.88,297.88 cw(c2962.41,279.41) 2988.53,279.41 ; R9.2@2986,310 cw(c3036.7,310) 3000.85,345.85 ; R9.2@2988.02,319.79 cw(c2992.23,328) 2983,328 ; R9.2@2994,310 cw(c3064.01,310) 3014.51,359.51 ; R8.2@3181.4,318.8 ccw(c3171.5,332) 3188,332 ; C10.1@3185,1690 3235,1690 3293.99,1631.01 U4.9@3383.87,1631.01 3498.99,1631.01 3555,1575 ; R8.2@3188,305 3188,332 ; R8.2@3194.6,318.8 cw(c3204.5,332) 3188,332 ; C10.1@3197.78,1682.22 cw(c3216.56,1663.44) 3216.56,1690 cw(c3216.56,1716.56) C10.1@3197.78,1697.78 ; P3.4@3219.47,105 ccw(c3157.84,105) 3201.42,148.58 ccw(c3245,192.16) P3.4@3245,130.53 ; C20.1@3220,1295 3279.54,1295 3300.59,1316.05 U4.25@3383.87,1316.05 3471.05,1316.05 3540,1385 3540,1423.32 3529.16,1434.16 ; C21.1@3220,1410 3295,1410 3319.16,1434.16 U4.19@3383.87,1434.16 3529.16,1434.16 ; P3.4@3227.47,105 ccw(c3185.16,105) 3215.08,134.92 ccw(c3245,164.84) P3.4@3245,122.53 ; C20.1@3232.78,1287.22 cw(c3251.56,1268.44) 3251.56,1295 cw(c3251.56,1321.56) C20.1@3232.78,1302.78 ; C21.1@3232.78,1402.22 cw(c3251.56,1383.44) 3251.56,1410 cw(c3251.56,1436.56) C21.1@3232.78,1417.78 ; P3.4@3245,79.47 cw(c3245,17.84) 3288.58,61.42 cw(c3332.16,105) P3.4@3270.53,105 ; P3.4@3245,87.47 cw(c3245,45.16) 3274.92,75.08 cw(c3304.84,105) P3.4@3262.53,105 ; C11.1@3617.22,2012.22 cw(c3596.05,1991.05) 3625.99,1991.05 ; C11.1@3625,2025 3625,2005.99 3625.99,2005 U4.136@3625.99,1873.13 3625.99,1815.99 3555,1745 3555,1575 ; 3625.99,1995.84 cw(c3649.16,1995.84) C11.1@3632.78,2012.22 ; U4.46@3645.68,1014.87 3645.68,949.32 3700,895 3700,845 3750,795 3835,795 3855,815 C18.1@3855,855 ; R30.2@3656.2,446.4 ccw(c3643,436.5) 3643,453 ; R30.2@3656.2,459.6 cw(c3643,469.5) 3643,453 ; R30.2@3670,453 3643,453 ; C19.1@3692.22,872.78 ccw(c3673.44,891.56) 3700,891.56 ccw(c3726.56,891.56) C19.1@3707.78,872.78 ; C19.1@3703,855 ccw(c3734.38,855) 3712.19,832.81 ; C19.1@3711,855 ccw(c3761.7,855) 3725.85,819.15 ; U4.126@3822.84,1873.13 3822.84,1962.84 3845,1985 C12.1@3845,2025 ; C12.1@3837.22,2012.22 cw(c3818.44,1993.44) 3845,1993.44 cw(c3871.56,1993.44) C12.1@3852.78,2012.22 ; U4.56@3842.53,1014.87 3842.53,922.47 3855,910 C18.1@3855,855 ; C18.1@3847.22,842.22 cw(c3828.44,823.44) 3855,823.44 cw(c3881.56,823.44) C18.1@3862.78,842.22 ; C18.1@3847.22,867.78 ccw(c3828.44,886.56) 3855,886.56 ccw(c3881.56,886.56) C18.1@3862.78,867.78 ; C18.1@3862.78,847.22 cw(c3881.56,828.44) 3881.56,855 cw(c3881.56,881.56) C18.1@3862.78,862.78 ; C17.1@3957.22,847.22 ccw(c3938.44,828.44) 3938.44,855 ccw(c3938.44,881.56) C17.1@3957.22,862.78 ; C17.1@3957.22,867.78 ccw(c3938.44,886.56) 3965,886.56 ccw(c3991.56,886.56) C17.1@3972.78,867.78 ; C17.1@3958.74,840.96 cw(c3950.46,829) 3965,829 ; C17.1@3971.26,840.96 ccw(c3979.54,829) 3965,829 ; T1.4@3999.78,575.37 cw(c3983.08,558.67) 4006.69,558.67 cw(c4030.3,558.67) 4013.61,575.37 ccw(c4046.46,542.52) 4000,542.52 ; 4000,561.83 cw(c4027.15,561.83) T1.4@4007.95,581.03 ; T1.4@4000,575 4000,490 3850,340 3640,340 3620,360 ; U4.64@4000.01,1014.87 4000.01,930.01 3965,895 C17.1@3965,855 ; T1.4@4006.69,600 4006.69,488.31 4040,455 4250,455 4355,350 4445,350 4460,365 4460,440 4447,453 R27.2@4415,453 4415,525 4480,590 4555,590 4622,657 R26.2@4622,730 ; 4019.69,1985.63 cw(c4064.37,1985.63) C13.1@4032.78,2017.22 ; 4019.69,2004.94 cw(c4045.06,2004.94) C13.1@4027.12,2022.88 ; C13.1@4025,2030 4019.69,2024.69 U4.116@4019.69,1873.13 4019.69,1720.31 4108.99,1631.01 U4.100@4242.13,1631.01 4290.55,1631.01 4329.54,1670 4360,1670 4405,1715 C14.1@4420,1715 4540,1715 4615,1640 R24.2@4622,1640 ; C25.2@4173,2530 R12.2@4252,2530 4252,2565 4274,2587 4443,2587 R38.2@4652,2378 ; C25.2@4180.78,2522.22 cw(c4199.56,2503.44) 4199.56,2530 cw(c4199.56,2556.56) C25.2@4180.78,2537.78 ; U4.82@4242.13,1276.68 4338.32,1276.68 4385,1230 C16.1@4425,1230 4570,1230 4625,1175 R25.2@4637,1175 ; U4.90@4242.13,1434.16 4419.16,1434.16 C15.1@4425,1440 4552,1440 4622,1370 ; R12.2@4244.22,2522.22 ccw(c4225.44,2503.44) 4225.44,2530 ccw(c4225.44,2556.56) R12.2@4244.22,2537.78 ; R12.2@4244.22,2542.78 ccw(c4225.44,2561.56) 4252,2561.56 ccw(c4278.56,2561.56) R12.2@4259.78,2542.78 ; R28.2@4252.35,772.75 ccw(c4217.69,781.69) 4243,807 ; 4252.9,797.1 cw(c4233.44,777.63) R28.2@4260.1,770.75 ; R29.2@4255.22,712.78 ccw(c4236.44,731.56) 4263,731.56 ccw(c4289.56,731.56) R29.2@4270.78,712.78 ; R28.2@4255.22,752.22 cw(c4236.44,733.44) 4263,733.44 cw(c4289.56,733.44) R28.2@4270.78,752.22 ; R28.2@4258.49,780.03 ccw(c4255.36,787) 4263,787 ; 4262.81,787.19 cw(c4249.18,773.57) R28.2@4267.84,768.75 ; R29.2@4263,700 R28.2@4263,765 ; R28.2@4267.51,780.03 cw(c4270.64,787) 4263,787 ; R28.2@4270.78,757.22 cw(c4289.56,738.44) 4289.56,765 cw(c4289.56,791.56) R28.2@4270.78,772.78 ; 4379.15,1689.15 cw(c4415,1653.3) C14.1@4415,1704 ; 4379.34,1434.16 ccw(c4379.34,1480.66) C15.1@4412.22,1447.78 ; 4392.81,1702.81 cw(c4415,1680.62) C14.1@4415,1712 ; 4398.65,1434.16 ccw(c4398.65,1461.35) C15.1@4417.88,1442.12 ; R27.2@4407.22,460.78 ccw(c4388.44,479.56) 4415,479.56 ccw(c4441.56,479.56) R27.2@4422.78,460.78 ; C16.1@4412.22,1222.22 ccw(c4393.44,1203.44) 4393.44,1230 ccw(c4393.44,1256.56) C16.1@4412.22,1237.78 ; R27.2@4427.78,445.22 cw(c4446.56,426.44) 4446.56,453 cw(c4446.56,479.56) R27.2@4427.78,460.78 ; C14.1@4432.78,1707.22 cw(c4451.56,1688.44) 4451.56,1715 cw(c4451.56,1741.56) C14.1@4432.78,1722.78 ; C16.1@4437.78,1222.22 cw(c4456.56,1203.44) 4456.56,1230 cw(c4456.56,1256.56) C16.1@4437.78,1237.78 ; C15.1@4437.78,1432.22 cw(c4456.56,1413.44) 4456.56,1440 cw(c4456.56,1466.56) C15.1@4437.78,1447.78 ; R10.2@4568,1790 4622,1736 R24.2@4622,1640 ; 4582.74,1672.26 ccw(c4622,1711.53) 4622,1656 ccw(c4622,1694.63) 4649.31,1667.31 ; 4589.2,1210.8 ccw(c4637,1258.6) R25.2@4637,1191 ; 4596.39,1658.61 ccw(c4622,1684.21) 4622,1648 ccw(c4622,1667.31) R24.2@4635.66,1653.66 ; 4602.86,1197.14 ccw(c4637,1231.28) R25.2@4637,1183 ; R26.2@4614.22,717.22 cw(c4595.44,698.44) 4622,698.44 cw(c4648.56,698.44) R26.2@4629.78,717.22 ; R26.2@4614.22,722.22 ccw(c4595.44,703.44) 4595.44,730 ccw(c4595.44,756.56) R26.2@4614.22,737.78 ; R26.2@4614.22,742.78 ccw(c4595.44,761.56) 4622,761.56 ccw(c4648.56,761.56) R26.2@4629.78,742.78 ; R24.2@4614.22,1627.22 cw(c4595.44,1608.44) 4622,1608.44 cw(c4648.56,1608.44) R24.2@4629.78,1627.22 ; 4616.51,1183.49 ccw(c4637,1203.97) R25.2@4637,1175 ; R25.2@4629.22,1162.22 cw(c4610.44,1143.44) 4637,1143.44 cw(c4663.56,1143.44) R25.2@4644.78,1162.22 ; R25.2@4629.22,1187.78 ccw(c4610.44,1206.56) 4637,1206.56 ccw(c4663.56,1206.56) R25.2@4644.78,1187.78 ; R24.2@4633,1645 cw(c4647.49,1645) 4637.24,1655.24 ; R40.2@4644.22,1912.22 cw(c4625.44,1893.44) 4652,1893.44 cw(c4678.56,1893.44) R40.2@4659.78,1912.22 ; R40.2@4644.22,1937.78 ccw(c4625.44,1956.56) 4652,1956.56 ccw(c4678.56,1956.56) R40.2@4659.78,1937.78 ; R39.2@4644.22,2237.22 cw(c4625.44,2218.44) 4652,2218.44 cw(c4678.56,2218.44) R39.2@4659.78,2237.22 ; R39.2@4644.22,2262.78 ccw(c4625.44,2281.56) 4652,2281.56 ccw(c4678.56,2281.56) R39.2@4659.78,2262.78 ; R38.2@4644.22,2357.22 cw(c4625.44,2338.44) 4652,2338.44 cw(c4678.56,2338.44) R38.2@4659.78,2357.22 ; R38.2@4652,2370 R39.2@4652,2250 R40.2@4652,1925 4652,1670 R24.2@4622,1640 ; 2983,328 R9.2@2983,305 2988.53,299.47 2988.53,186.47 3020,155 3195,155 P3.4@3245,105 3295,55 3380,55 3620,295 3620,360 ; 2983,328 3035,380 3140,380 3188,332 ; 3529.16,1434.16 3555,1460 3555,1575 ; 3620,360 3620,430 3643,453 ; C18.1@3855,855 C17.1@3965,855 ; 3965,829 3987,807 4243,807 ; 3965,829 C17.1@3965,855 ; 4243,807 4263,787 ; R28.2@4263,765 4263,787 ; R28.2@4263,765 4505,765 4540,730 R26.2@4622,730 ; R26.2@4622,730 4622,779 4688,845 4688,1055 4637,1106 R25.2@4637,1175 ; 4622,1370 4622,1333 4637,1318 R25.2@4637,1175 ; 4622,1370 R24.2@4622,1640
  Top Layer w10: C11.1@3625,2025 3680,2080 3805,2080 3845,2040 C12.1@3845,2025 ; C11.1@3625,2040 ccw(c3625,2076.21) 3650.61,2050.61 ; C11.1@3635,2030 cw(c3647.07,2030) C11.1@3638.54,2038.54 ; 3820.86,2064.14 cw(c3786.72,2030) C12.1@3835,2030 ; 3837.93,2047.07 cw(c3820.86,2030) C12.1@3845,2030 ; R44.2@4374.94,3382.94 R44.2@4375,3383 R43.2@4461.43,3383 R42.2@4547.86,3383 R41.2@4634.29,3383 R35.2@4720.71,3383 R33.2@4807.14,3383 R32.2@4893.57,3383 R31.2@4980,3383 ; R44.2@4387.07,3375.93 cw(c4404.14,3358.86) 4404.14,3383 cw(c4404.14,3407.14) R44.2@4387.07,3390.07 ; U5.8@4405,2297.8 4567.2,2297.8 4615,2250 R39.2@4652,2250 ; R43.2@4449.36,3375.93 ccw(c4432.29,3358.86) 4432.29,3383 ccw(c4432.29,3407.14) R43.2@4449.36,3390.07 ; R43.2@4473.5,3375.93 cw(c4490.57,3358.86) 4490.57,3383 cw(c4490.57,3407.14) R43.2@4473.5,3390.07 ; R42.2@4535.79,3375.93 ccw(c4518.71,3358.86) 4518.71,3383 ccw(c4518.71,3407.14) R42.2@4535.79,3390.07 ; R42.2@4559.93,3375.93 cw(c4577,3358.86) 4577,3383 cw(c4577,3407.14) R42.2@4559.93,3390.07 ; R41.2@4622.21,3375.93 ccw(c4605.14,3358.86) 4605.14,3383 ccw(c4605.14,3407.14) R41.2@4622.21,3390.07 ; R39.2@4644.93,2242.93 ccw(c4627.86,2225.86) 4627.86,2250 ccw(c4627.86,2274.14) R39.2@4644.93,2257.07 ; R41.2@4646.36,3375.93 cw(c4663.43,3358.86) 4663.43,3383 cw(c4663.43,3407.14) R41.2@4646.36,3390.07 ; R35.2@4708.64,3375.93 ccw(c4691.57,3358.86) 4691.57,3383 ccw(c4691.57,3407.14) R35.2@4708.64,3390.07 ; R35.2@4732.79,3375.93 cw(c4749.86,3358.86) 4749.86,3383 cw(c4749.86,3407.14) R35.2@4732.79,3390.07 ; R33.2@4795.07,3375.93 ccw(c4778,3358.86) 4778,3383 ccw(c4778,3407.14) R33.2@4795.07,3390.07 ; R33.2@4819.21,3375.93 cw(c4836.28,3358.86) 4836.28,3383 cw(c4836.28,3407.14) R33.2@4819.21,3390.07 ; R32.2@4881.5,3375.93 ccw(c4864.43,3358.86) 4864.43,3383 ccw(c4864.43,3407.14) R32.2@4881.5,3390.07 ; R32.2@4905.64,3375.93 cw(c4922.71,3358.86) 4922.71,3383 cw(c4922.71,3407.14) R32.2@4905.64,3390.07
VCC3V3B: C33.2 C34.2 R46.2 R47.1 R48.1 R49.1 U6.4 U6.17 | length 1247.3
  Top Layer w10: R46.2@2055,2968 2107,2968 2118.5,2956.5 U6.17@2182.91,2956.5 ; U6.4@2490,2751.77 2594.77,2751.77 C33.2@2600,2757 ; 2558.24,2751.77 ccw(c2558.24,2793.76) C33.2@2587.93,2764.07 ; R49.1@2592.93,2697.07 ccw(c2575.86,2714.14) 2600,2714.14 ccw(c2624.14,2714.14) R49.1@2607.07,2697.07 ; C33.2@2592.93,2749.93 cw(c2575.86,2732.86) 2600,2732.86 cw(c2624.14,2732.86) C33.2@2607.07,2749.93 ; R49.1@2600,2685 C33.2@2600,2757 ; C33.2@2612.07,2749.93 cw(c2629.14,2732.86) 2629.14,2757 cw(c2629.14,2781.14) C33.2@2612.07,2764.07 ; 2641.54,2757 ccw(c2641.54,2803.46) C34.2@2674.39,2770.61 ; 2656.03,2757 cw(c2656.03,2731.03) C34.2@2674.39,2749.39 ; C34.2@2690,2760 C34.2@2687,2757 ; C34.2@2705.61,2749.39 cw(c2723.97,2731.03) 2723.97,2757 ; C34.2@2705.61,2770.61 ccw(c2738.46,2803.46) 2738.46,2757 ; R47.1@2712.93,2982.07 ccw(c2695.86,2999.14) 2720,2999.14 ccw(c2744.14,2999.14) R47.1@2727.07,2982.07 ; R48.1@2712.93,3022.93 cw(c2695.86,3005.86) 2720,3005.86 cw(c2744.14,3005.86) R48.1@2727.07,3022.93 ; R47.1@2720,2970 R48.1@2720,3035 2760,3035 2780,3015 2780,2790 2747,2757 C34.2@2687,2757 ; R48.1@2727.07,3027.93 cw(c2744.14,3010.86) 2744.14,3035 cw(c2744.14,3059.14) R48.1@2727.07,3042.07 ; C33.2@2600,2757 C34.2@2687,2757
VCC5V: C2.2 C3.1 C6.1 C7.2 C23.2 C26.2 C27.2 C38.1 J2.2 Q3.D Q3.Tab R1.2 R2.2 R3.2 R7.1 R13.2 R18.1 R19.1 R20.1 R34.1 R45.2 S1.1 U1.16 U2.38 U3.3 U6.20 U8.3 U10.1 U11.1 U11.2 U12.1 U12.2 U13.1 | length 7296.6
  Top Layer w10: v1@1565,832.5 cw(c1565,814.39) 1577.8,827.2 cw(c1590.61,840) v1@1572.5,840 ; v1(1565,840) 1670,735 R20.1@1670,650 ; v1(1640,1945) 1642,1947 U3.3@1735,1947 1856,1947 C7.2@1870,1933 ; v1@1645.3,1939.7 cw(c1662.93,1922.07) 1662.93,1947 ; v1@1645.3,1950.3 ccw(c1653.28,1958.28) 1653.28,1947 ; R20.1@1662.93,657.07 ccw(c1645.86,674.14) 1670,674.14 ccw(c1694.14,674.14) R20.1@1677.07,657.07 ; R20.1@1675,640 cw(c1675,627.93) R20.1@1683.54,636.46 ; R20.1@1682.07,642.93 cw(c1699.14,625.86) 1699.14,650 cw(c1699.14,674.14) R20.1@1682.07,657.07 ; R20.1@1685,650 ccw(c1721.21,650) 1695.61,624.39 ; U3.3@1725.81,1937.81 ccw(c1703.62,1915.62) 1703.62,1947 ccw(c1703.62,1978.38) U3.3@1725.81,1956.19 ; U3.3@1744.19,1937.81 cw(c1766.38,1915.62) 1766.38,1947 cw(c1766.38,1978.38) U3.3@1744.19,1956.19 ; 1807.06,1947 cw(c1807.06,1875.06) C7.2@1857.93,1925.93 ; 1831.2,1947 cw(c1831.2,1899.2) C7.2@1865,1933 ; C7.2@1855.34,1947 cw(c1855.34,1923.34) C7.2@1872.07,1940.07 ; 1953.55,691.45 cw(c1924.36,662.26) R19.1@1965,655 ; R19.1@1955.16,656.76 ccw(c1901.36,666.36) 1940,705 ; R19.1@1964,663 ccw(c1955,675) 1970,675 ; 1965,110 R7.1@1965,90 2164,90 S1.1@2285,211 2176,320 1770,320 1715,375 1715,605 R20.1@1670,650 ; 1967.1,677.9 cw(c1947.35,658.15) R19.1@1974.84,653.24 ; R19.1@1976,663 cw(c1985,675) 1970,675 ; R19.1@1982.07,647.93 cw(c1999.14,630.86) 1999.14,655 cw(c1999.14,679.14) R19.1@1982.07,662.07 ; R18.1@2017.93,647.93 ccw(c2000.86,630.86) 2000.86,655 ccw(c2000.86,679.14) R18.1@2017.93,662.07 ; R18.1@2030,655 R19.1@1970,655 1970,675 ; U2.38@2169.41,1398.5 2253.5,1398.5 C6.1@2320,1465 2365,1510 2365,1542.78 2430,1607.78 2430,1850 ; U2.38@2202.77,1393.69 cw(c2214.4,1382.06) 2214.4,1398.5 cw(c2214.4,1414.95) U2.38@2202.77,1403.32 ; 2285.86,1430.86 ccw(c2251.72,1465) C6.1@2300,1465 ; 2297.93,1442.93 cw(c2315,1425.86) C6.1@2315,1450 ; C6.1@2302.93,1447.93 ccw(c2285.86,1465) C6.1@2310,1465 ; C6.1@2325,1480 ccw(c2325,1504.14) 2342.07,1487.07 ; C6.1@2330,1465 cw(c2354.14,1465) C6.1@2337.07,1482.07 ; C6.1@2340,1465 cw(c2388.28,1465) 2354.14,1499.14 ; 2367,1933 2430,1870 2430,1850 ; U11.2@2400,969.41 U11.1@2400,995 2520,995 v1(2565,1040) ; v1@2542.5,1730 ccw(c2524.39,1730) 2537.2,1742.8 ccw(c2550,1755.61) v1@2550,1737.5 ; v1@2547.82,1403.77 ccw(c2562.86,1412.27) 2562.86,1395 ; v1(2550,1405) 2560,1405 2570,1395 ccw(c2559.23,1384.23) v1@2553.05,1398.15 ; v1@2552.5,1395 2580,1395 ; v1@2555.3,1724.7 cw(c2568.11,1711.89) 2568.11,1730 cw(c2568.11,1748.11) v1@2555.3,1735.3 ; v1@2556.53,1408.69 ccw(c2580,1421.96) 2580,1395 ; v1@2557.5,1040 cw(c2539.39,1040) 2552.2,1027.2 cw(c2565,1014.39) v1@2565,1032.5 ; U12.2@2595,1354.41 U12.1@2595,1380 2580,1395 ; U10.1@2595,1730 v1(2550,1730) 2430,1850 ; R13.2@3105,653 3373,653 C26.2@3375,655 C27.2@3375,575 3375,466.34 J2.2@3366.18,457.52 ; R13.2@3117.07,645.93 cw(c3134.14,628.86) 3134.14,653 cw(c3134.14,677.14) R13.2@3117.07,660.07 ; 3333.96,653 ccw(c3333.96,696.04) C26.2@3364.39,665.61 ; 3343.62,653 cw(c3343.62,623.62) C26.2@3364.39,644.39 ; J2.2@3348.84,474.86 ccw(c3285.68,538.03) 3375,538.03 ; J2.2@3355.91,467.79 ccw(c3309.82,513.88) 3375,513.88 ; J2.2@3362.98,460.72 ccw(c3333.96,489.74) 3375,489.74 ; C27.2@3364.39,559.39 cw(c3338.79,533.79) 3375,533.79 cw(c3411.21,533.79) C27.2@3385.61,559.39 ; C27.2@3364.39,590.61 ccw(c3338.79,616.21) 3375,616.21 ccw(c3411.21,616.21) C27.2@3385.61,590.61 ; C26.2@3364.39,639.39 cw(c3338.79,613.79) 3375,613.79 cw(c3411.21,613.79) C26.2@3385.61,639.39 ; 3375,495.44 ccw(c3404.1,495.44) J2.2@3383.52,474.86 ; R20.1@1670,650 1826.87,650 1881.87,705 1940,705 ; 1940,705 1970,675
  Bottom Layer w10: v1@1559.7,845.3 ccw(c1546.89,858.11) 1565,858.11 ccw(c1583.11,858.11) v1@1570.3,845.3 ; v1(1565,840) 1565,1870 v1(1640,1945) ; v1@1632.5,1945 cw(c1614.39,1945) 1627.2,1932.2 cw(c1640,1919.39) v1@1640,1937.5 ; v1@2544.7,1399.7 cw(c2531.89,1386.89) 2550,1386.89 cw(c2568.11,1386.89) v1@2555.3,1399.7 ; v1@2544.7,1410.3 ccw(c2531.89,1423.11) 2550,1423.11 ccw(c2568.11,1423.11) v1@2555.3,1410.3 ; v1@2544.7,1724.7 cw(c2531.89,1711.89) 2550,1711.89 cw(c2568.11,1711.89) v1@2555.3,1724.7 ; v1(2550,1730) 2550,1085 2565,1070 v1(2565,1040) ; v1@2559.7,1045.3 ccw(c2546.89,1058.11) 2565,1058.11 ccw(c2583.11,1058.11) v1@2570.3,1045.3
VCC5VU: C30.2 F1.2 S2.2 | length 915.4
  Top Layer w10: C30.2@1080,2645 1078.11,2646.89 S2.2@955,2646.89 885,2716.89 885,2750 845,2790 845,2920 1125,3200 F1.2@1200,3200
VCC5VW: Q3.S R51.2 S2.1 | length 542.8
  Top Layer w10: S2.1@955,2765 1055,2765 1179.17,2889.17 Q3.S@1319.45,2889.17 1322,2891.72 R51.2@1322,3015
VEE: J2.18 R16.2 | length 1603
  Top Layer w10: J2.18@1766.18,432.99 cw(c1766.18,373.78) 1808.05,415.65 cw(c1849.92,457.52) J2.18@1790.71,457.52 ; J2.18@1766.18,442.99 cw(c1766.18,407.92) 1790.98,432.72 cw(c1815.78,457.52) J2.18@1780.71,457.52 ; J2.18@1766.18,457.52 1828.7,395 2080,395 2120,435 2120,505 2240,625 2476.87,625 2487.5,635.63 2487.5,636.39 2511.11,660 2840,660 2910,590 R16.2@2977,590 ; R16.2@2969.93,582.93 ccw(c2952.86,565.86) 2952.86,590 ccw(c2952.86,614.14) R16.2@2969.93,597.07
VO: J2.3 R14.1 | length 338
  Top Layer w8: J2.3@3248.13,475.57 ccw(c3207.4,516.3) 3265,516.3 ; J2.3@3253.79,469.91 ccw(c3226.72,496.98) 3265,496.98 ; R14.1@3257.22,577.22 cw(c3238.44,558.44) 3265,558.44 cw(c3291.56,558.44) R14.1@3272.78,577.22 ; 3265,502.69 ccw(c3311.35,502.69) J2.3@3278.57,469.91 ; 3265,522 ccw(c3330.66,522) J2.3@3284.23,475.57 ; R14.1@3265,590 3265,458.7 J2.3@3266.18,457.52
XTAL1: C8.1 U2.15 Y1.2 | length 680.1
  Top Layer w10: Y1.2@1376.47,1383.11 cw(c1401.38,1396.44) 1381.41,1416.41 ; Y1.2@1380,1385 1380,1415 1410,1445 ; Y1.2@1385.29,1387.83 cw(c1413.8,1403.08) 1390.94,1425.94 ; Y1.2@1394.11,1392.55 cw(c1426.21,1409.72) 1400.47,1435.47 ; Y1.2@1402.93,1397.26 cw(c1438.63,1416.36) 1410,1445 ; C8.1@1517.93,1437.93 ccw(c1500.86,1420.86) 1500.86,1445 ccw(c1500.86,1469.14) C8.1@1517.93,1452.07 ; C8.1@1542.07,1437.93 cw(c1559.14,1420.86) 1559.14,1445 cw(c1559.14,1469.14) C8.1@1542.07,1452.07 ; U2.15@1687.23,1488.18 ccw(c1675.6,1476.55) 1675.6,1492.99 ccw(c1675.6,1509.44) U2.15@1687.23,1497.81 ; U2.15@1720.59,1492.99 1632.99,1492.99 1585,1445 C8.1@1530,1445 1410,1445
XTAL2: C9.1 U2.14 Y1.1 | length 683.5
  Top Layer w10: Y1.1@1380,1559 cw(c1380,1447.95) 1458.53,1526.47 ; Y1.1@1380,1569 cw(c1380,1482.09) 1441.46,1543.54 ; Y1.1@1380,1579 cw(c1380,1516.23) 1424.38,1560.62 ; Y1.1@1380,1585 1400,1585 1460,1525 C9.1@1530,1525 1530.51,1524.49 U2.14@1720.59,1524.49 ; Y1.1@1406,1585 ccw(c1420.49,1585) 1410.24,1574.76 ; C9.1@1517.93,1517.93 ccw(c1500.86,1500.86) 1500.86,1525 ccw(c1500.86,1549.14) C9.1@1517.93,1532.07 ; C9.1@1542.07,1517.93 cw(c1557.91,1502.09) 1557.91,1524.49 ; C9.1@1542.07,1532.07 ccw(c1560.38,1550.38) 1560.38,1524.49 ; U2.14@1687.23,1519.67 ccw(c1675.6,1508.04) 1675.6,1524.49 ccw(c1675.6,1540.93) U2.14@1687.23,1529.3
pads on no net: CY1.1 E1.0 J1.1 J1.4 J1.6 J1.7 J1.8 J1.9 J2.0 J2.16 J3. J3.4 P2.3 P3.6 P3.7 P3.8 T1. T1.1 T1.8 U2.6 U2.28 U2.39 U2.42 U4.0 U4.20 U4.58 U4.59 U4.60 U4.61 U4.68 U4.69 U4.70 U4.71 U4.78 U4.79 U4.80 U4.81 U4.84 U4.85 U4.86 U4.87 U4.88 U4.89 U4.96 U4.97 U4.101 U4.102 U4.109 U5.9 U6.2 U6.3 U6.6 U6.8 U6.9 U6.10 U6.11 U6.12 U6.22 U6.23 U6.24

## Polygon pours and split planes (outlines as drawn)
GND on Top Layer "Top Layer-GND" (solid, shelved, pour order 2): 0,3470 5385,3470 5385,0 0,0
GND on Bottom Layer "Top Layer-GND" (solid, shelved, pour order 4): 0,3470 5385,3470 5385,0 0,0

## Keep-outs
Keep-Out Layer:
  circle w10: c1108.43,3020 r56.57
  circle w10: c4568.43,3010 r56.57
  circle w10: c1108.43,455 r56.57
  circle w10: c4578.43,455 r56.57
  lines w5: 760,75 ccw(c835,75) 835,0 ; 760,3395 cw(c835,3395) 835,3470 ; 5310,0 ccw(c5310,75) 5385,75 ; 5315,3470 cw(c5312.5,3397.5) 5385,3395 ; 760,0 760,3470 5385,3470 5385,0 760,0

## Silkscreen, mask and mechanical layers (free items; w line width, h text height)
Top Overlay:
  drawing of 290 lines, arcs and shapes, not listed
  text "USB2COM" at 1770,3410 h40
  text "MAX51_V1.0" at 5690,3321 h40
  text "COM" at 2965,3305 h40
  text "2014.11.16" at 5685,3256 h40
  text "3V3" at 2785,2715 h40 r270
  text "Buzzer" at 5020,2475 h40
  text "EC11E" at 5115,1735 h40
  text "51ISP" at 1155,245 h40 r270
  text "RESET" at 2035,65 h40
  text "JTAG" at 3480,60 h40
  text "TF-Card" at 4405,55 h40
Bottom Overlay:
  circle w10: c2265,3310 r155.08
  lines w8: 1905,3175 2600,3175 2600,3035 1905,3035 1905,3245 1960,3300 2050,3390 2135,3390 ; 2695,3305 2855,3305 3090,3070 3090,3025 ; 3090,3025 2365,3025 2365,2884.13 3090,2884.13 3090,3025
  lines w10: 2694.94,3318.98 ccw(c2541.58,3314.67) 2695,3315
  text "RXD1" at 2105,3095 h40
  text "EPMRXD" at 2360,3095 h40
  text "PCTXD" at 2580,3095 h40
  text "PCRXD" at 2105,3045 h40
  text "S52TXD" at 2360,3045 h40
  text "TXD1" at 2580,3045 h40
  text "TXD1" at 2585,2965 h40
  text "EPMTXD" at 2850,2965 h40
  text "PCRXD" at 3065,2965 h40
  text "S52RXD" at 2850,2905 h40
  text "RXD1" at 3065,2905 h40
  text "PCTXD" at 2585,2900 h40

## Dimensions
760,3470 to 760,0 on Mechanical 13
760,3470 to 5385,3470 on Mechanical 13

## Text inside footprints (layer, text, board x,y; h text height)
J2: Top Overlay "1" at 3555,430 h40; Top Overlay "20" at 1400,425 h40
P1: Top Overlay "2" at 2055,3335 h40; Top Overlay "1" at 2055,3235 h40; Top Overlay "1" at 2735,3235 h40; Top Overlay "1" at 2775,3235 h40; Top Overlay "12" at 2735,3335 h40
P2: Top Overlay "10" at 1300,125 h40 r180; Top Overlay "9" at 1300,225 h40 r180; Top Overlay "1" at 1840,225 h40 r180; Top Overlay "2" at 1860,125 h40 r180
P3: Top Overlay "2" at 3445,125 h40 r180; Top Overlay "1" at 3425,225 h40 r180; Top Overlay "9" at 2885,225 h40 r180; Top Overlay "10" at 2885,125 h40 r180
Rp1: Mechanical 1 "R1" at 2675.62,227.01 h40
Rp2: Mechanical 1 "R1" at 2470.62,227.01 h40